# Altium PCB Line_follower1_PCB.PcbDoc (part 1 of 2)
Units mil, origin at the board's own origin, x right, y up, seen from the top; angles counter-clockwise.
Board outline 3907.67 x 2313.18 mil, 2 copper layers (Top Layer, Bottom Layer); 67 components, 62 nets, 270 pads, 120 vias.
Unrouted connection lines stored in the file: 2.
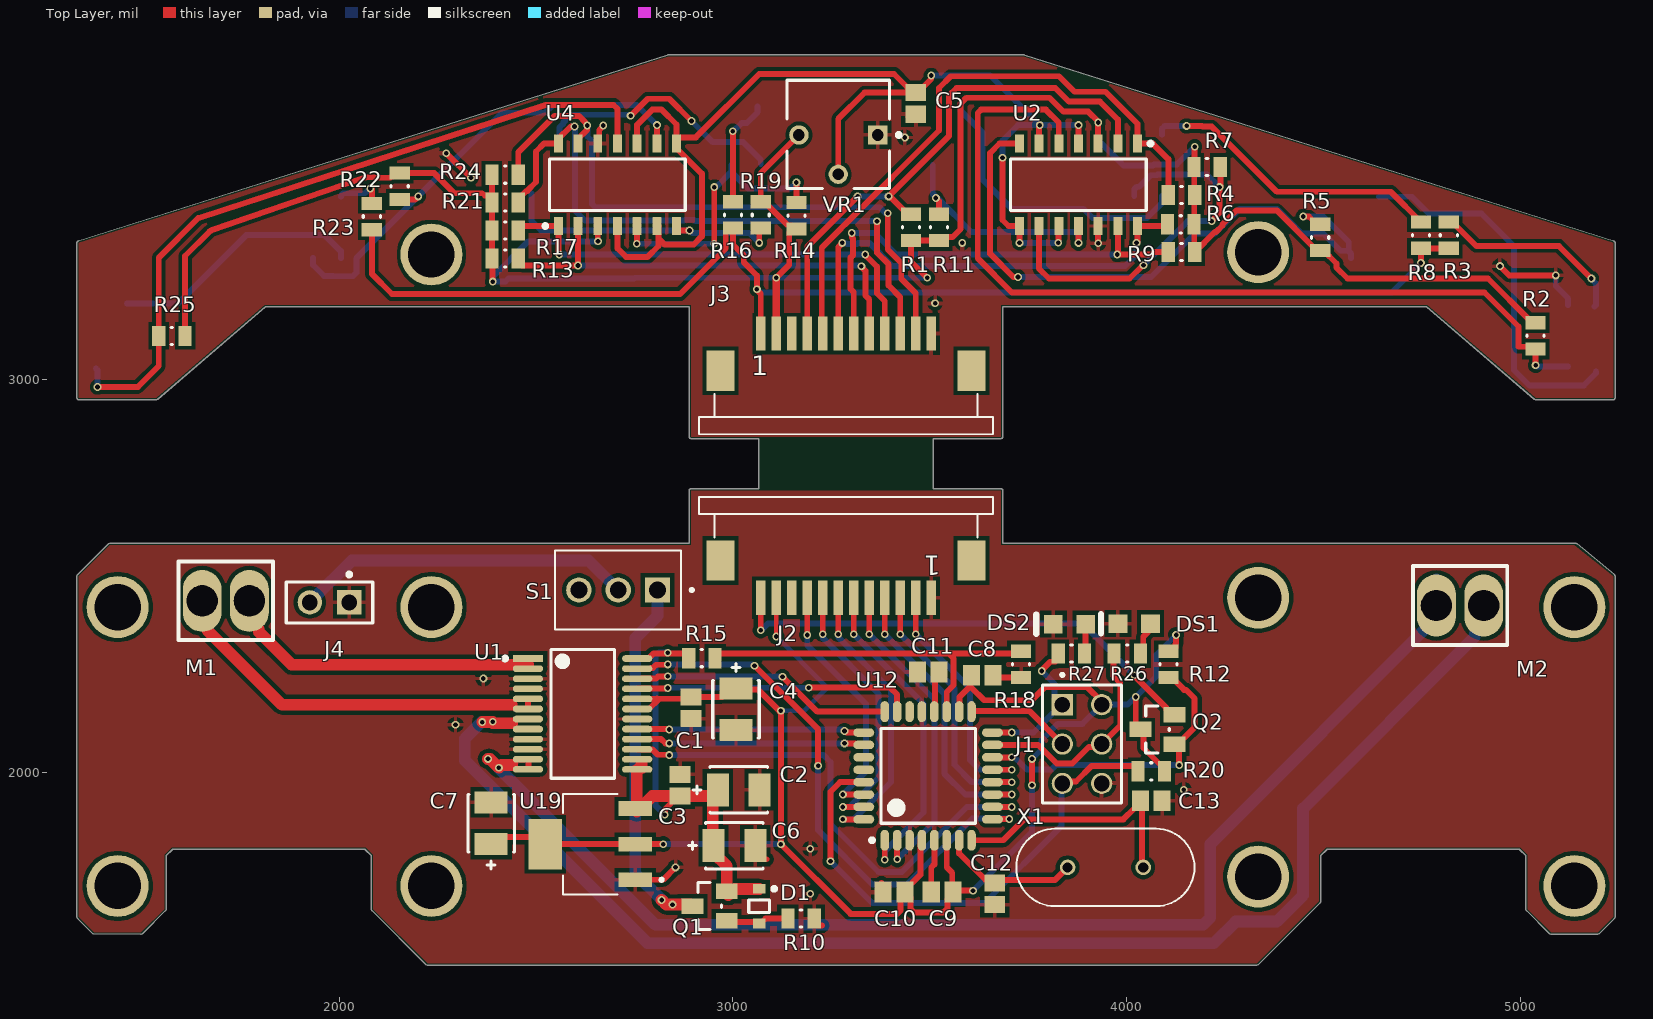
[diagram p0: Top Layer view]
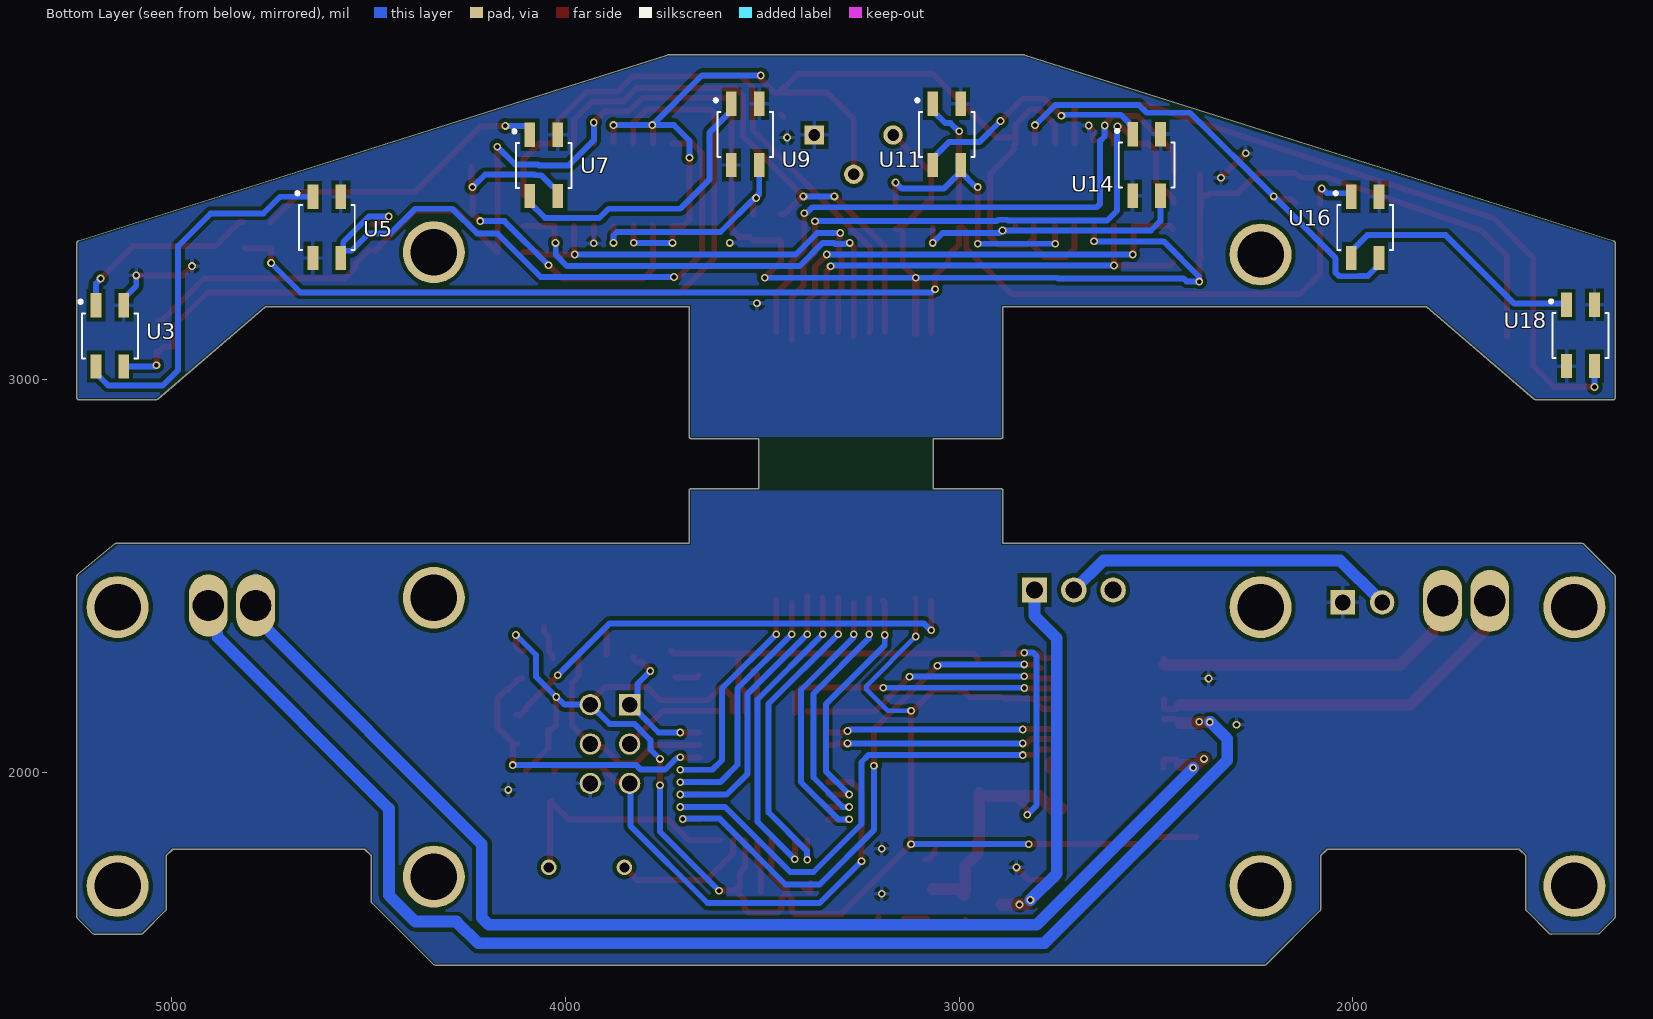
[diagram p1: Bottom Layer view, seen from below]
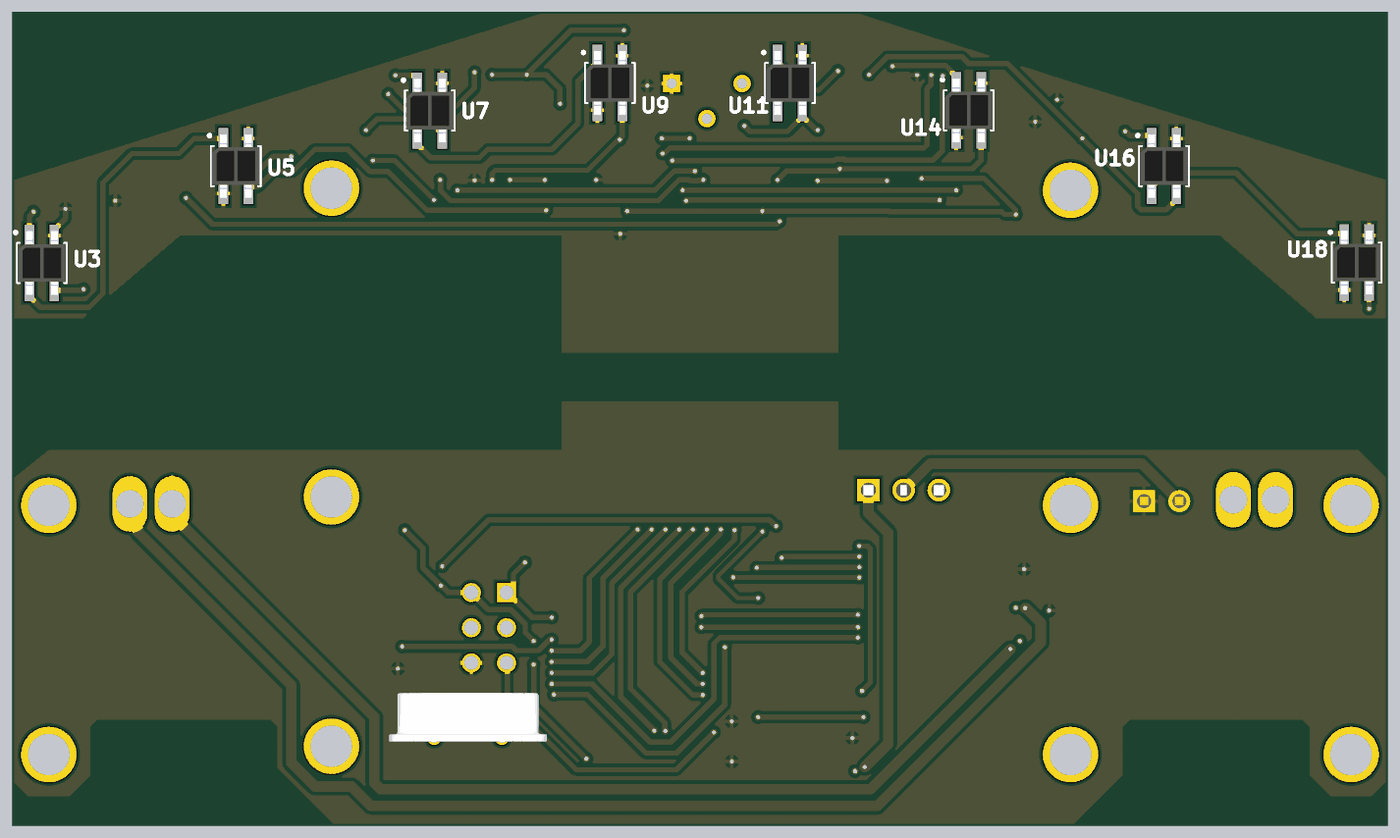
[diagram p2: 3D render of the assembled board from below, using the file's embedded part models]

## Layer stack, top to bottom
Top Solder: solder mask 0.4, Solder Resist, Dk 3.5
Top Layer: signal copper 1.4
Dielectric 1: dielectric 12.6, FR-4, Dk 4.8
Bottom Layer: signal copper 1.4
Bottom Solder: solder mask 0.4, Solder Resist, Dk 3.5

## Board outline
1374.41,1590.94 1335.04,1630.31 1333.57,1633.86 1333.57,2500 1335.04,2503.55 1413.78,2582.29 1417.32,2583.76 2888.69,2583.76 2888.69,2716.54 cw(c2893.7,2716.54) 2893.7,2721.55 3065.85,2721.55 3065.85,2849.32 2893.7,2849.32 cw(c2893.7,2854.33) 2888.69,2854.33 2888.69,3183.96 1812.88,3183.96 1538.7,2948.95 1535.43,2947.74 1338.58,2947.74 cw(c1338.58,2952.76) 1333.57,2952.76 1333.57,3346.46 cw(c1338.58,3346.46) 1337.07,3351.24 2833.13,3823.68 2834.65,3823.91 3740.16,3823.91 3741.68,3823.68 5237.72,3351.24 cw(c5236.21,3346.45) 5241.24,3346.46 5241.24,2952.76 cw(c5236.22,2952.76) 5236.22,2947.74 5039.37,2947.74 5036.11,2948.95 4761.92,3183.96 3686.12,3183.96 3686.12,2854.33 cw(c3681.1,2854.33) 3681.1,2849.32 3508.95,2849.32 3508.95,2721.55 3681.1,2721.55 cw(c3681.1,2716.54) 3686.12,2716.54 3686.12,2583.76 5141.73,2583.76 5144.96,2582.58 5239.42,2503.87 5241.24,2500 5241.24,1633.86 5239.77,1630.31 5200.4,1590.94 5196.85,1589.47 5078.74,1589.47 5075.19,1590.94 5016.14,1650 5014.67,1653.54 5014.67,1789.26 4997.92,1806.01 4509.95,1806.01 4493.2,1789.26 4493.2,1673.23 4491.74,1669.68 4334.25,1512.2 4330.71,1510.73 2224.41,1510.73 2220.86,1512.2 2083.07,1650 2081.6,1653.54 2081.6,1789.26 2064.85,1806.01 1576.88,1806.01 1560.13,1789.26 1560.13,1653.54 1558.66,1650 1499.61,1590.94 1496.06,1589.47

## Design rules (kind name [scope] priority, off if disabled: settings)
Clearance [All] p1: gap=10 ignorepadtopadclearanceinfootprint=FALSE except(0: Arc-Hole Track-Hole SMDPad-Hole THPad-Hole Via-Hole Fill-Hole Poly-Hole Region-Hole Text-Hole; 5: SMDPad-SMDPad; 7.87: Arc-SMDPad Track-SMDPad; 19.68: THPad-THPad)
HoleSize [All] p1: absolutevalues=TRUE maxlimit=248.03 minlimit=11.81 maxpercent=80.000 minpercent=20.000
PolygonConnect [All] p1: connectstyle=Relief reliefconductorwidth=10 reliefentries=4 polygonreliefangle="90 Angle" airgapwidth=10
RoutingVias [All] p1: holewidth=11.81 width=19.68 viastyle="Through Hole" minholewidth=11.81 minwidth=19.68 maxholewidth=19.68 maxwidth=27.56
SilkToSolderMaskClearance [IsPad] p1: minsilkscreentomaskgap=3.94 clearancetoexposedcopper=TRUE
SolderMaskExpansion SolderMaskExpansion_Vias [IsVia] p1: expansion=4 istentingtop=TRUE
SolderMaskExpansion [All] p2: expansion=4 istentingtop=FALSE
Width [All] p1: maxlimit=100 minlimit=10 preferedwidth=19.68 minimp=50.000000 maximp=50.000000 favimp=50.000000
28 further rules are at their usual default settings.

## Components (designator, comment, footprint, x,y, rotation, side; value= is the part's Value field where it differs from the comment)
C1 "100n" CAPC2013X88X50LL20T25 2893.7,2165.35 r90 top
C2 "10u" FP-T491B106K020AT-MFG 3014.76,1956.69 r180 top
C3 "100n" CAPC2013X88X50LL20T25 2866.14,1968.5 r270 top
C4 "10u" FP-T491B106K020AT-MFG 3007.87,2161.42 r90 top
C5 "100n" CAPC2013X88X50LL20T25 3464.57,3700.79 r90 top
C6 "10u" FP-T491B106K020AT-MFG 3003.94,1814.96 r180 top
C7 "10u" FP-T491B106K020AT-MFG 2385.83,1872.05 r270 top
C8 "100n" CAPC2013X88X50LL20T25 3633.86,2248.03 r180 top
C9 "100n" CAPC2013X88X50LL20T25 3531.5,1696.85 r0 top
C10 "100n" CAPC2013X88X50LL20T25 3409.45,1696.85 r0 top
C11 "100n" CAPC2013X88X50LL20T25 3496.06,2255.91 r0 top
C12 "22p" CAPC2013X88X50LL20T25 3665.35,1692.91 r270 top
C13 "22p" CAPC2013X88X50LL20T25 4062.99,1929.13 r0 top
D1 "MM3Z10VT1G" ONSC-SOD-323-2-477-02_V 3066.93,1661.42 r270 top
DS1 "HSMG-C170" AVAG-HSMX-C170_V 4019.69,2378.94 r180 top
DS2 "HSMG-C170" AVAG-HSMX-C170_V 3855.31,2377.95 r180 top
J1 "TSW-103-15-F-D" SAMTEC_TSW-103-15-F-D 3837.01,2173.23 r270 top
J2 "68611214422" 68611214422 3287.4,2539.37 r180 top
J3 "68611214422" 68611214422 3287.4,3021.65 r0 top
J4 "M20-9990245" FP-M20-9990245-MFG 1975.2,2433.07 r180 top
M1 "Component_1" PCBComponent_1 1771.65,2437.01 r180 top
M2 "Component_1" PCBComponent_1 4787.4,2425.2 r0 top
Q1 "FDN340P" FP-527AG-MFG 2940.95,1661.42 r180 top
Q2 "FDN340P" FP-527AG-MFG 4078.74,2110.24 r180 top
R1 "10k" RESC0805(2012)_L 3452.76,3385.83 r270 top value="12000.00 Ohm"
R2 "10k" RESC0805(2012)_L 5039.37,3110.24 r90 top value="12000.00 Ohm"
R3 "220R" RESC0805(2012)_L 4818.9,3366.14 r90 top value="12000.00 Ohm"
R4 "10k" RESC0805(2012)_L 4139.76,3468.5 r0 top value="12000.00 Ohm"
R5 "10k" RESC0805(2012)_L 4492.13,3360.24 r270 top value="12000.00 Ohm"
R6 "10k" RESC0805(2012)_L 4137.8,3393.7 r0 top value="12000.00 Ohm"
R7 "10k" RESC0805(2012)_L 4204.72,3539.37 r180 top value="12000.00 Ohm"
R8 "220R" RESC0805(2012)_L 4748.03,3366.14 r90 top value="12000.00 Ohm"
R9 "10k" RESC0805(2012)_L 4139.76,3322.83 r0 top value="12000.00 Ohm"
R10 "10k" RESC0805(2012)_L 3173.23,1629.92 r180 top value="12000.00 Ohm"
R11 "10k" RESC0805(2012)_L 3523.62,3385.83 r270 top value="12000.00 Ohm"
R12 "10k" RESC0805(2012)_L 4106.3,2275.59 r90 top value="12000.00 Ohm"
R13 "10k" RESC0805(2012)_L 2421.26,3307.09 r180 top value="12000.00 Ohm"
R14 "10k" RESC0805(2012)_L 3161.42,3415.35 r270 top value="12000.00 Ohm"
R15 "10k" RESC0805(2012)_L 2921.26,2291.34 r180 top value="12000.00 Ohm"
R16 "220R" RESC0805(2012)_L 3000,3417.32 r90 top value="12000.00 Ohm"
R17 "10k" RESC0805(2012)_L 2421.26,3377.95 r180 top value="12000.00 Ohm"
R18 "10k" RESC0805(2012)_L 3732.28,2275.59 r90 top value="12000.00 Ohm"
R19 "10k" RESC0805(2012)_L 3070.87,3417.32 r90 top value="12000.00 Ohm"
R20 "10k" RESC0805(2012)_L 4062.99,2003.94 r180 top value="12000.00 Ohm"
R21 "10k" RESC0805(2012)_L 2421.26,3448.82 r180 top value="12000.00 Ohm"
R22 "10k" RESC0805(2012)_L 2153.54,3490.16 r90 top value="12000.00 Ohm"
R23 "220R" RESC0805(2012)_L 2082.68,3413.39 r90 top value="12000.00 Ohm"
R24 "10k" RESC0805(2012)_L 2421.26,3519.68 r180 top value="12000.00 Ohm"
R25 "10k" RESC0805(2012)_L 1574.8,3110.24 r0 top value="12000.00 Ohm"
R26 "470R" RESC0805(2012)_L 4001.97,2303.15 r180 top value="12000.00 Ohm"
R27 "470R" RESC0805(2012)_L 3860.24,2303.15 r180 top value="12000.00 Ohm"
S1 "2MS1T1B1M2QES" SW_2MS1T1B1M2QES 2708.66,2464.57 r180 top
U1 "TB6612FNG,C,8,EL" FP-SSOP24-P-300-0_65A-IPC_A 2618.11,2149.61 r0 top
U2 "LM339DR2G" ONSC-SOIC-14-751A-03_V 3877.95,3494.09 r270 top
U3 "QRE1113GR" SOIC180P460X187-4N 5157.48,3110.24 r180 bottom
U4 "LM339DR2G" ONSC-SOIC-14-751A-03_V 2706.69,3494.09 r90 top
U5 "QRE1113GR" SOIC180P460X187-4N 4606.3,3385.83 r180 bottom
U7 "QRE1113GR" SOIC180P460X187-4N 4055.12,3543.31 r180 bottom
U9 "QRE1113GR" SOIC180P460X187-4N 3543.31,3622.05 r180 bottom
U11 "QRE1113GR" SOIC180P460X187-4N 3031.5,3622.05 r180 bottom
U12 "ATmega328-AUR" 32A_L 3496.06,1992.13 r90 top
U14 "QRE1113GR" SOIC180P460X187-4N 2523.62,3544.29 r180 bottom
U16 "QRE1113GR" SOIC180P460X187-4N 1968.5,3385.83 r180 bottom
U18 "QRE1113GR" SOIC180P460X187-4N 1421.26,3111.22 r180 bottom
U19 "LM1117MP-5.0" SOT230P700X180-4N 2637.8,1818.9 r180 top
VR1 "3362P-1-103LF" BOUR-3362P 3267.72,3622.05 r180 top
X1 "ABL-16.000MHZ-T" XTAL_HC49P488W46L1150T500H350 3946.46,1759.84 r180 top

## Footprints (in the part's own frame and the unit in brackets; to place one, negate y for a bottom-side part, rotate by r counter-clockwise, add the part's x,y. Pads: shape width x height; smd on the part's side, far side on the other; paste and mask are expansions set on the pad)
32A_L [mm] "Thin QFP, 32-Leads, Body 7x7mm, Pitch 0.8mm, IPC High Density"
  oval 1.35x0.55 smd: 1(-4.15,2.8) 2(-4.15,2) 3(-4.15,1.2) 4(-4.15,0.4) 5(-4.15,-0.4) 6(-4.15,-1.2) 7(-4.15,-2) 8(-4.15,-2.8) 17(4.15,-2.8) 18(4.15,-2) 19(4.15,-1.2) 20(4.15,-0.4) 21(4.15,0.4) 22(4.15,1.2) 23(4.15,2) 24(4.15,2.8)
  oval 0.55x1.35 smd: 9(-2.8,-4.15) 10(-2,-4.15) 11(-1.2,-4.15) 12(-0.4,-4.15) 13(0.4,-4.15) 14(1.2,-4.15) 15(2,-4.15) 16(2.8,-4.15) 25(2.8,4.15) 26(2,4.15) 27(1.2,4.15) 28(0.4,4.15) 29(-0.4,4.15) 30(-1.2,4.15) 31(-2,4.15) 32(-2.8,4.15)
  silkscreen extent -4.27,-3.05 3.05,3.75, body extent -3.5,-3.5 3.5,3.5, height 1.2
68611214422 [mm]
  rect 0.6x2.2 smd: 1(-5.5,2.4) 2(-4.5,2.4) 3(-3.5,2.4) 4(-2.5,2.4) 5(-1.5,2.4) 6(-0.5,2.4) 7(0.5,2.4) 8(1.5,2.4) 9(2.5,2.4) 10(3.5,2.4) 11(4.5,2.4) 12(5.5,2.4)
  rect 1.8x2.6 smd: Z1(-8.1,0) Z2(8.1,0)
  silkscreen extent -9.5,-4.1 9.5,-1.5
AVAG-HSMX-C170_V [mm] "SMD, 2-Leads, Body 2x1.25mm, Height 0.8mm"
  rect 1.2x1.2 smd: 1(-1.05,0) 2(1.05,0)
  silkscreen extent 2.15,-0.63 2.15,0.63, body extent -1,-0.63 1,0.63, height 0.8
BOUR-3362P [mm] "THD, 3-Leads, Body 6.6x6.99mm, Pitch 2.54mm"
  rect 1.25x1.25 hole 0.75: 1(-2.54,0.035)
  round 1.25 hole 0.75: 2(0,2.575) 3(2.54,0.035)
  silkscreen extent -4.03,-3.49 3.3,3.5, body extent -3.3,-3.49 3.3,3.49, height 4.95
CAPC2013X88X50LL20T25 [mm] "Chip Capacitor, 2-Leads, Body 2.00x1.25mm, IPC High Density"
  rect 1.1x1.35 smd: 1(-0.7,0) 2(0.7,0)
  body extent -1.1,-0.72 1.1,0.72, height 0.88
FP-527AG-MFG [mm]
  rect 1.4x1 smd paste+0 mask+0: 1(-1.1,0.95) 2(-1.1,-0.95) 3(1.1,0)
  silkscreen extent -0.76,-1.52 0.76,1.52, body extent -1.9,-1.62 1.9,1.62, height 0.25
FP-M20-9990245-MFG [mm]
  rect 1.57x1.57 hole 1.02 paste-2539.97 mask+0: 1(-1.27,0)
  round 1.57 hole 1.02 paste-2539.97 mask+0: 2(1.27,0)
  silkscreen extent -2.79,-1.92 2.79,1.32, body extent -2.89,-1.42 2.89,1.42, height 0.25
FP-SSOP24-P-300-0_65A-IPC_A [mm]
  rect 1.954x0.432 smd paste+0 mask+0: 1(-3.525,3.575)
  rrect100% 1.954x0.432 smd paste+0 mask+0: 2(-3.525,2.925) 3(-3.525,2.275) 4(-3.525,1.625) 5(-3.525,0.975) 6(-3.525,0.325) 7(-3.525,-0.325) 8(-3.525,-0.975) 9(-3.525,-1.625) 10(-3.525,-2.275) 11(-3.525,-2.925) 12(-3.525,-3.575) 13(3.525,-3.575) 14(3.525,-2.925) 15(3.525,-2.275) 16(3.525,-1.625) 17(3.525,-0.975) 18(3.525,-0.325) 19(3.525,0.325) 20(3.525,0.975) 21(3.525,1.625) 22(3.525,2.275) 23(3.525,2.925) 24(3.525,3.575)
  silkscreen extent -5.13,-4.15 2.05,4.15, body extent -5,-4.65 5,4.65, height 0.25
FP-T491B106K020AT-MFG [mm]
  rect 1.42x2.13 smd paste+0 mask+0: 1(-1.35,0) 2(1.35,0)
  silkscreen extent -1.85,-1.5 2.95,1.5, body extent -2.18,-1.62 2.18,1.62, height 0.25
ONSC-SOD-323-2-477-02_V [mm] "SOD, 2-Leads, Body 1.7x1.25mm"
  rect 0.63x0.83 smd: 1(-1.115,0) 2(1.115,0)
  silkscreen extent -1.24,-0.67 0.4,1.09, body extent -0.85,-0.63 0.85,0.63, height 1.06
ONSC-SOIC-14-751A-03_V [mm] "SOIC, 14-Leads, Body 8.75x4mm, Pitch 1.27mm"
  rect 1.18x0.58 smd: 1(-2.66,3.81) 2(-2.66,2.54) 3(-2.66,1.27) 4(-2.66,0) 5(-2.66,-1.27) 6(-2.66,-2.54) 7(-2.66,-3.81) 8(2.66,-3.81) 9(2.66,-2.54) 10(2.66,-1.27) 11(2.66,0) 12(2.66,1.27) 13(2.66,2.54) 14(2.66,3.81)
  silkscreen extent -2.78,-4.38 1.67,4.78, body extent -2,-4.38 2,4.38, height 1.75
PCBComponent_1 [mm]
  oval 2.5x4 hole 2: 1(0,0) 2(3.048,0)
  silkscreen extent -1.52,-2.54 4.57,2.54
RESC0805(2012)_L [mm] "Chip Resistor, Body 2.0x1.3mm, IPC High Density"
  rect 0.85x1.3 smd: 1(-0.85,0) 2(0.85,0)
  silkscreen extent -0.05,-0.55 0.05,0.55, body extent -1.1,-0.67 1.1,0.68, height 0.7
SAMTEC_TSW-103-15-F-D [mm]
  rect 1.37x1.37 hole 1.02: 01(0,0)
  round 1.37 hole 1.02: 02(0,2.54) 03(2.54,0) 04(2.54,2.54) 05(5.08,0) 06(5.08,2.54)
  silkscreen extent -2.02,-1.27 6.35,3.81
SOIC180P460X187-4N [mm]
  rect 0.69x1.57 smd: 1(-0.9,1.975) 2(-0.9,-1.975) 3(0.9,-1.975) 4(0.9,1.975)
  silkscreen extent -2,-1.45 1.8,2.3, body extent -1.7,-2.3 1.7,2.3, height 1.87
SOT230P700X180-4N [mm]
  rect 2.15x0.95 smd: 1(-2.9,2.3) 2(-2.9,0) 3(-2.9,-2.3)
  rect 2.15x3.25 smd: 4(2.9,0)
  silkscreen extent -4.7,-3.25 1.75,3.25
SW_2MS1T1B1M2QES [mm]
  rect 1.635x1.635 / inner round 1.635 / far side rect 1.635x1.635 hole 1.09: 1(-2.54,0)
  round 1.635 hole 1.09: 2(0,0) 3(2.54,0)
  silkscreen extent -4.85,-2.54 4.07,2.54, body extent -4.07,-3 4.07,3, height 23.63
XTAL_HC49P488W46L1150T500H350 [mm]
  round 1.007 hole 0.657: 1(-2.44,0) 2(2.44,0)
  silkscreen extent -5.75,-2.5 5.75,2.5, body extent -5.75,-3.25 5.75,5.75, height 2.5

## Part data
C1 C3 C5 C8 C9 C10 C11 C12 C13: library part CMP-2007-00266-1, "0805", Manufacturer=Kemet, Part Number=C0805C103K5RACTU
C2 C4 C6 C7: library part CMP-2000-07191-2, "CAP TANT 10UF 10% 20V 1411", Capacitance=10uF, Case Code (Imperial)=1411, Case Code (Metric)=3528, Dielectric Material=Tantalum, ESR (Equivalent Series Resistance)=2.1R, Leakage Current=2uA, Max Operating Temperature=125°C, Min Operating Temperature=-55°C, Package Quantity=1, Ripple Current=201mA, Tolerance=10%, Voltage=20V, Case/Package=1411, Depth=2.8mm, Dissipation Factor=6%, Failure Rate=0.001%, Features="General Purpose", Height=1.9mm, Height - Seated (Max)=0.083inch, Lead Free="Lead Free", Length=3.5mm, Life (Hours)=2000Hour, Mount="Surface Mount", Number of Pins=2, Packaging="Tape and Reel", Polarity=Polar, Radiation Hardening=No, REACH SVHC="No SVHC", RoHS Compliant=Yes, Termination=SMD/SMT, Voltage Rating=20V, Voltage Rating (DC)=20V, Weight=0.002293oz, Width=2.8mm
D1: library part CMP-1060-00715-1, "Zener Voltage Regulator, 300 mW, 2-Pin SOD-323, Pb-Free, Tape and Reel", Manufacturer="On Semiconductor", ComponentLink1Description="Manufacturer URL", ComponentLink1URL=http://www.onsemi.com/, ComponentLink2Description=Datasheet, ComponentLink2URL=http://www.onsemi.cn/pub_link/Collateral/MM3Z2V4T1-D.PDF, ComponentLink3Description="Package Specification", ComponentLink3URL=http://www.onsemi.com/pub_link/Collateral/477-02.PDF.1, DatasheetVersion="Rev. 9", Mounting Technology="Surface Mount", P Max (W)=0.3, PackageDescription="2-Pin SOD, Body 1.7 x 1.25 mm", PackageReference=SOD-323-2-477-02, PackageVersion="Rev. H, 03/2007", Packing="Tape and Reel", PartNumber=MM3Z10VT1G, RoHS=Pb-Free, VZ Typ (V)=10
DS1 DS2: library part CMP-2000-05062-1, "Chip LED, Green, 2.2 V, -40 to 85 degC, 2-Pin SMD, Pb-Free, Tape and Reel", Forward Current If=20mA, Forward Voltage=2.2V, Forward Voltage VF Max=2.6V, LED Colour=Green, Manufacturer=Avago, Operating Temperature Max=85degC, Operating Temperature Min=-30degC, Operating Temperature Range=-30degCto+85degC, Opto Case Style=SMD, Package Description="2-Pin Surface Mount Device, Body 2 x 1.25 mm, Height 0.8 mm", Package Reference=HSMX-C170, Storage Temperature Min=-40degC, Bulb Size=1.25mmx1.4mm, Datasheet URL=https://datasheet.ciiva.com/29280/180495-da-01-en-chip-led-hsmg-c170-gelb-gruen-29280971.pdf, Datasheet Version=Oct-08, Dominant Wavelength=572nm, Dominant Wavelength Typ=572nm, External Depth=0.8mm, External Length / Height=2mm, External Width=1.25mm, Forward Current If Max=20mA, LED Mounting=SMD, LED Type=Standard, Lens Shape=Rectangular, Light Area Height=1mm, Luminous Intensity=15mcd, Luminous Intensity Min=4mcd, Luminous Intensity Typ=15mcd, Manufacturer URL=http://www.avagotech.com/, Mounting Type=SMD, MSL=MSL2A-4weeks, No. of Pins=2, Opto Mounting Orientation=Top, Packaging=CutTape, Peak Forward Current=20mA, Peak Wavelength=570nm, PIV Max=5V, Storage Temperature Max=85degC, SVHC=NoSVHC(16-Jun-2014), Viewing Angle=170deg, Voltage Vf Typ=2.2V, Wavelength Typ=570nm
J1: Package=None, Availability=Unavailable, MP=TSW-103-15-F-D, Price=None
J2 J3: "12 Position FPC Connector Contacts, Bottom 0.039 (1.00mm) Surface Mount, Right Angle", Package=None, Availability="In Stock", Check_prices=https://www.snapeda.com/parts/68611214422/Wurth+Elektronik/view-part/?ref=eda, MF="Wurth Elektronik", MP=68611214422, Price=None, Purchase-URL=https://pricing.snapeda.com/search/part/68611214422/?ref=eda, SnapEDA_Link=https://www.snapeda.com/parts/68611214422/Wurth+Elektronik/view-part/?ref=snap
J4: library part CMP-15831-000105-1, "CONN HEADER VERT 2POS 2.54MM", Case/Package=SIL, Color=Black, Contact Resistance=25mR, Current=3A, Flammability Rating="UL94 V-0", Insulation Resistance=10GR, Max Operating Temperature=105°C, Min Operating Temperature=-40°C, Package Quantity=1000, Voltage=50V, Voltage Rating (AC)=750V, Connector Type="Male Pin", Contact Finish - Mating=GOLD, Contact material=Brass, Contact Mating Length=0.24inch, Contact Plating=Gold, Contact Shape=Square, Contact Type="Male Pin", Current Rating=3A, Depth=2.54mm, Fastening Type=Pull, Gender=Male, Height=0.12inch, Housing Color=Black, Housing material=Nylon, Insulation Color=Black, Insulation Material=Nylon, Lead Pitch=2.54mm, Length=5.08mm, Mated Stacking Heights=16.54mm, Mating Cycles=300, Max Current Rating=3A, Mount="Through Hole", Number of Contacts=2, Number of Poles=2, Number of Positions=2, Number of Rows=1, Orientation=Straight, Packaging=Bulk, Pitch=2.54mm, Radiation Hardening=No, Reach SVHC Compliant=Yes, Series=M20, Termination=Solder, Weight=0.25lb, Width=0.25inch, Working Voltage=750V
M1 M2: "Pady do silnika"
Q1 Q2: library part CMP-2100-03638-2, "MOSFET P-CH 20V 2A SSOT3", Case/Package=SOT-23, Continuous Drain Current (ID)=2A, Current Rating=-2A, Drain to Source Breakdown Voltage=-20V, Drain to Source Resistance=60mR, Drain to Source Voltage (Vdss)=20V, Gate to Source Voltage (Vgs)=8V, Input Capacitance=779pF, Max Operating Temperature=150°C, Max Power Dissipation=500mW, Min Operating Temperature=-55°C, On-State Resistance=70MR, Package Quantity=1, Threshold Voltage=-800mV, Contact Plating=Tin, Dual Supply Voltage=-20V, Element Configuration=Single, Fall Time=11ns, Height=0.94mm, Lead Free="Lead Free", Length=2.92mm, Mount="Surface Mount", Nominal Vgs=-800mV, Number of Elements=1, Number of Pins=3, Packaging="Tape and Reel", Power Dissipation=500mW, Radiation Hardening=No, Rds On Max=70mR, REACH SVHC="No SVHC", Rise Time=9ns, Termination=SMD/SMT, Turn-Off Delay Time=27ns, Turn-On Delay Time=10ns, Voltage Rating (DC)=-20V, Weight=0.03g, Width=3.05mm
R1 R2 R4 R5 R6 R7 R9 R10 R11 R12 R13 R14 R15 R17 R18 R19 R20 R21 R22 R24 R25: library part CMP-1013-00631-1, "10K 0.125W 1% 0805 (2012 Metric)  SMD", Case-EIA=0805, Case-Metric=2012, Power="0.125 W", Tolerance="1 %", Technology=SMT
R3 R8 R16 R23 R26 R27: library part CMP-1013-00631-1, "220 0.125W 1% 0805 (2012 Metric)  SMD", Case-EIA=0805, Case-Metric=2012, Power="0.125 W", Tolerance="1 %", Technology=SMT
S1: "Toggle Switches Sub-Miniature SPDT switch on-on pc thru-hole", Package=None, Check_prices=https://www.snapeda.com/parts/2MS1T1B1M2QES/E%2526E/view-part/?ref=eda, MF=Dailywell, MP=2MS1T1B1M2QES, SnapEDA_Link=https://www.snapeda.com/parts/2MS1T1B1M2QES/E%2526E/view-part/?ref=snap
U1: library part CMP-2100-03693-4, "IC MOTOR DRIVER 2.7V-5.5V 24SSOP", Case/Package=SSOP, Max Operating Temperature=85°C, Max Supply Voltage=5.5V, Min Operating Temperature=-20°C, Min Supply Voltage=2.7V, Operating Supply Voltage=3V, Output Current=1A, Package Quantity=1, Interface=Parallel, Logic Function="AND GATE", Mount="Surface Mount", Number of Outputs=2, Number of Pins=24, Packaging="Tape and Reel", Series=-
U2 U4: library part CMP-1305-00036-1, "Single Supply Quad Comparators, 0 to 70 degC, 14-Pin SOIC, Pb-Free, Tape and Reel", Manufacturer="On Semiconductor", ComponentLink1Description="Manufacturer URL", ComponentLink1URL=http://www.onsemi.com/, ComponentLink2Description=Datasheet, ComponentLink2URL=http://www.onsemi.com/pub_link/Collateral/LM339-D.PDF, ComponentLink3Description="Package Specification", ComponentLink3URL=http://www.onsemi.com/pub_link/Collateral/751A-03.PDF, DatasheetVersion="Rev. 20", IO Typ (mA)=16, Mounting Technology="Surface Mount", PackageDescription="14-Pin Small Outline Integrated Circuit, Body 8.65 x 3.9 mm, Pitch 1.27 mm", PackageReference=SOIC-14-751A-03, PackageVersion="Rev. K, 05/2011", Packing="Tape and Reel", PartNumber=LM339DR2G, RoHS=TRUE
U3 U5 U7 U9 U11 U14 U16 U18: "Reflective Optical Sensor 0.039 (1mm) 4-SMD, Gull Wing", Package="ARUSM-313-4 ON Semiconductor", Availability="In Stock", Check_prices=https://www.snapeda.com/parts/QRE1113GR/Onsemi/view-part/?ref=eda, MF="ON Semiconductor", MP=QRE1113GR, Price=None, Purchase-URL=https://pricing.snapeda.com/search/part/QRE1113GR/?ref=eda, SnapEDA_Link=https://www.snapeda.com/parts/QRE1113GR/Onsemi/view-part/?ref=snap
U12: library part CMP-0095-00268-2, "8-bit AVR Microcontroller, 32KB Flash, 1KB EEPROM, 2KB SRAM, 32-pin TQFP, Industrial Grade (-40°C to 85°C), Reel", Code_JEDEC=MS-026-ABA, ComponentLink1Description="Manufacturer URL", ComponentLink1URL=http://www.atmel.com/, ComponentLink2Description="ATmega48A/48PA/88A/88PA/168A/168PA/328/328P Datasheet", ComponentLink2URL=http://www.atmel.com/dyn/resources/prod_documents/doc8271.pdf, ComponentLink3Description="ATmega48A/48PA/88A/88PA/168A/168PA/328/328P Summary", ComponentLink3URL=http://www.atmel.com/dyn/resources/prod_documents/8271S.pdf, DatasheetVersion="revD, May-2011", PackageDescription="32-Lead, 7x7x1.0 mm Body, 0.8mm Lead Pitch, Thin Profile Plastic Quad Flat Package (TQFP)", PackageReference=32A, PackageVersion="revC, Oct-2010", RevisionNote="DatasheetVersion & PackageVersion updated. URLs added."
U19: "Space Saving 800mA Low-Dropout Linear Regulator with Internal Current Limit", Package="SOT-223-4 Texas Instruments", Availability=Unavailable, DigiKey-Purchase-URL=https://snapeda.com/shop?store=DigiKey&id=22380, MF="Texas Instruments", Mouser-Purchase-URL=https://snapeda.com/shop?store=Mouser&id=22380, MP=LM1117MP-5.0/NOPB, Price=None, SnapEDA_Link=https://www.snapeda.com/parts/LM1117MP-5.0/NOPB/Texas%20Instruments/view-part/22380/?ref=snap, Texas_Instruments-Purchase-URL=https://snapeda.com/shop?store=Texas+Instruments&id=22380
VR1: library part CMP-1747-00004-1, "Square Trimpot(R) Trimming Potentiometer, 10 KOhm, 300 V, -55 to 125 degC, 3-Pin THD, RoHS, Tube", Case Code (Imperial)=0612, Case Code (Metric)=1632, Case/Package=1206, Max Operating Temperature=125degC, Min Operating Temperature=-25degC, Package Quantity=5000, Power Rating="1 W", Resistance="50 mohm", Tolerance=1%, Voltage Rating="220 mV", ComponentLink1Description="Manufacturer URL", ComponentLink1URL=http://www.bourns.com/, ComponentLink2Description=Datasheet, ComponentLink2URL=http://www.bourns.com/docs/Product-Datasheets/3362.pdf, DatasheetVersion=May-16, Height="0.6 mm", Length="3.2 mm", Mount="Surface Mount", PackageDescription="3-Pin Through Hole Device, Body 6.6 x 6.99 mm, Pitch 2.54 mm", PackageReference=3326P, Packaging="Tape and Reel", Pins=2, REACH SVHC="No SVHC", RoHSCompliant=True, Width="1.6 mm"
X1: "16 MHz Â±10ppm Crystal 18pF 40 Ohms HC-49/US", Package=None, Availability="In Stock", Check_prices=https://www.snapeda.com/parts/ABL-16.000MHZ/Abracon/view-part/?ref=eda, MF="Abracon Corporation", MP=ABL-16.000MHZ, Price=None, Purchase-URL=https://pricing.snapeda.com/search/part/ABL-16.000MHZ/?ref=eda, SnapEDA_Link=https://www.snapeda.com/parts/ABL-16.000MHZ/Abracon/view-part/?ref=snap

## Free pads (board coordinates)
  round 157.48 hole 118.11: 0(1437.01,1712.6) 0(1437.01,2421.26) 0(2234.25,1712.6) 0(2234.25,2421.26) 0(2234.25,3316.93) 0(4334.65,1736.22) 0(4334.65,2444.88) 0(4334.65,3322.83) 0(5137.8,1712.6) 0(5137.8,2421.26)

## Via types
v1: diameter 19.68, hole 11.81, Top Layer to Bottom Layer, tented both sides, 120 vias

## Nets (pads, with @x,y where several pads share a name; then routed paths per layer and width w, separated by ;. In a path a pad name is that pad's centre, name@x,y a point inside that pad or via, vN(x,y) a via of type N, cw(c..) or ccw(c..) an arc to the next point about the centre after c; other vN are vias at no path point)
+5: C1.2 C4.2 C7.2 C8.2 C9.2 C10.2 J1.02 J2.11 J3.2 Q2.3 R1.2 R2.2 R4.2 R5.2 R6.2 R7.2 R9.2 R11.2 R12.2 R13.2 R14.2 R17.2 R19.2 R20.1 R21.2 R22.2 R24.2 R25.2 U1.19 U1.20 U2.3 U4.3 U12.4 U12.6 U12.18 U19.2 U19.4 VR1.3 | length 10600.3
  Top Layer w12: v1(3110.24,2346.46) J2.11 ; v1@3118.11,2153.54 3120.08,2155.51 v1(3122.05,2157.48)
  Top Layer w15: R25.2 1608.27,3312.99 1670.78,3375.5 cw(c1681.38,3364.89) 1676.51,3379.08 2062.99,3511.81 2067.01,3511.81 2068.38,3513.19 2089.1,3513.19 2090.47,3511.81 2129.92,3511.81 2132.5,3514.39 2135.45,3514.39 R22.2@2145.67,3524.61 ; R22.2 2241.33,3523.62 2292.51,3472.44 2362.2,3472.44 ; 2369.7,3466.91 2378.56,3466.91 R21.2@2387.8,3457.68 ; R13.2@2385.83,3311.02 2388.87,3307.98 2388.87,3248.93 v1(2389.76,3248.03) ; R21.2@2385.83,3437.99 R21.2@2385.83,3452.76 ; R13.2@2387.8,3311.02 R17.2 R21.2@2387.8,3444.88 ; R21.2 R24.2 ; C7.2@2397.64,1836.61 2513.78,1836.61 U19.4@2519.68,1830.71 ; U19.4@2515.75,1822.83 U19.4@2515.75,1830.71 ; U19.4@2519.69,1818.9 U19.4 U19.2 v1(2822.83,1818.9) ; U4.3 2656.69,3351.18 v1(2657.48,3350.39) ; U1.19 2786.85,2162.4 2810.26,2185.81 ; U1.20 2757.29,2188.38 2807.09,2188.38 ; 2807.09,2188.98 2807.69,2188.38 C1.2@2886.43,2188.38 ; C1.2 2972.24,2192.91 2987.99,2208.66 C4.2@3000,2208.66 ; C4.2 3010.37,2212.07 3063.52,2212.07 3120.08,2155.51 3122.05,2153.54 v1(3122.05,1818.9) 3299.21,1641.73 3417.32,1641.73 3426.11,1650.52 3426.11,1682.02 C10.2@3440.94,1696.85 ; v1(3110.24,3257.87) 3143.33,3290.96 3143.33,3372.66 3152.56,3381.89 R14.2 ; R14.2@3157.48,3381.89 3148.25,3391.12 3139.39,3391.12 3079.72,3450.79 R19.2 3070.87,3523.82 3165.35,3618.31 VR1.3@3165.35,3622.05 ; C10.2@3437.01,1701.77 3476.38,1741.14 U12.4@3476.38,1830.71 ; C10.2@3438.98,1694.88 3451.16,1682.7 3451.16,1654.46 3459.95,1645.67 3535.43,1645.67 3544.9,1655.14 3544.9,1677.78 C9.2@3560.04,1692.91 ; v1(3494.09,3257.87) 3452.76,3299.21 R1.2 R11.2@3521.65,3352.36 ; R11.2 3532.85,3361.59 3558.44,3361.59 3578.74,3381.89 3578.74,3700.79 3593.11,3715.16 3804.53,3715.16 3839.76,3679.92 3902.76,3679.92 v1@3927.95,3654.72 ; U12.6 3543.31,1759.84 3557.22,1745.93 C9.2@3557.22,1702.62 ; C9.2@3559.06,1701.77 C9.2 3566.93,1704.72 3570.87,1700.79 v1(3610.24,1700.79) ; U12.18 3576.08,2156.78 3576.08,2193.2 3602.85,2219.98 ; 3606.3,2216.54 3638.41,2184.43 3759.23,2184.43 3792.5,2217.7 3900.41,2217.7 J1.02@3937.01,2181.1 ; v1(3759.84,1968.5) v1(3759.84,2035.43) ; U2.3 v1(3927.95,3652.36) ; v1(4023.62,2192.91) 4023.62,2122.05 Q2.3 ; Q2.3@4043.31,2110.24 4043.31,2062.99 R20.1@4100.39,2005.91 ; R12.2 4115.16,2309.06 4124.39,2318.29 4124.39,2327.15 4125.98,2328.74 v1(4125.98,2350.39) ; R6.2 4172.24,3394.68 R4.2@4172.24,3468.5 ; R6.2@4172.24,3390.75 4172.24,3323.82 R9.2 4224.84,3374.45 4227.86,3374.45 4243.88,3390.47 4243.88,3393.48 4279.53,3429.13 4381.89,3429.13 4474.04,3336.99 4474.04,3336 4483.27,3326.77 R5.2@4484.25,3326.77 ; R4.2 4172.24,3469.49 4172.24,3536.42 4169.29,3539.37 4172.33,3542.41 4172.33,3589.65 v1(4173.23,3590.55) ; R5.2@4496.06,3326.77 4500.98,3326.77 4533.77,3293.99 4533.77,3283.46 4561.33,3255.91 4918.31,3255.91 5024.61,3149.61 R2.2@5035.43,3149.61
  Top Layer w20: J3.2 v1(3110.24,3257.87)
  Bottom Layer w12: v1(3110.24,2346.46) 3235.19,2221.51 3235.19,2211.56 3181.1,2157.48 v1(3122.05,2157.48)
  Bottom Layer w15: v1(2657.48,3350.39) 2480.32,3350.39 2390.66,3260.74 2390.66,3248.93 v1(2389.76,3248.03) 2390.14,3248.41 2422.11,3248.41 2429.61,3255.91 2748.57,3255.91 2750.54,3257.87 v1(3110.24,3257.87) v1(3494.09,3257.87) ; v1(2822.83,1818.9) v1(3122.05,1818.9) ; v1(3610.24,1700.79) 3759.84,1850.39 v1(3759.84,1968.5) ; v1(3759.84,2035.43) 3783.91,2059.5 3783.91,2083.13 3825.24,2124.45 3888.23,2124.45 J1.02 4002.67,2173.23 4022.35,2192.91 v1(4023.62,2192.91) 4074.8,2244.09 4074.8,2299.21 v1(4125.98,2350.39) ; v1(3927.95,3652.36) 3927.95,3607.48 3992.13,3543.31 4066.93,3543.31 4069.49,3545.87 4128.54,3545.87 v1(4173.23,3590.55)
+5_LED: J2.12 Q2.2 | length 1236.8
  Top Layer w15: v1(3070.87,2362.2) J2.12@3070.87,2437.01 ; v1(4019.68,2248.03) 4019.68,2246.76 4101.99,2164.46 4101.99,2159.82 4114.17,2147.64 Q2.2@4125.98,2147.64
  Bottom Layer w15: v1(3070.87,2362.2) 3072.13,2362.2 3089.63,2379.7 3888.01,2379.7 v1(4019.68,2248.03)
+BAT: C2.2 C3.2 C6.2 D1.1 Q1.2 R15.2 U1.13 U1.14 U1.24 U19.3 | length 1360.2
  Top Layer w15: U1.13@2755.93,2007.93 U1.13 ; U1.14 2760.33,2034.45 U1.14@2767.72,2027.06 ; U1.24 2758.91,2290.35 2759.84,2291.28 2786.2,2291.28 2797.85,2302.93 v1@2834.65,2302.93 ; v1(2826.77,1893.7) 2827.67,1894.6 2827.67,1907.39 2861.22,1940.94 C3.2@2862.2,1940.94 ; v1(2834.65,2305.28) 2834.65,2303.15 v1@2834.65,2302.93 ; R15.2@2889.76,2303.15 2889.55,2302.93 v1@2834.65,2302.93 ; C2.2@2935.04,1940.94 2950.79,1956.69 C2.2@2946.85,1956.69
  Top Layer w30: U19.3@2740.16,1909.45 2744.73,1909.45 2755.93,1920.65 U1.13@2755.93,2007.93 ; U19.3@2755.91,1901.57 2795.28,1940.94 C3.2@2861.22,1940.94 ; U1.13@2767.72,2011.81 U1.14@2767.72,2027.06 ; C3.2@2862.2,1940.94 C3.2 C2.2@2935.04,1940.94 ; C6.2@2948.82,1816.93 C2.2@2948.82,1944.88 ; C6.2@2952.76,1822.83 2952.76,1795.08 2984.25,1763.58 Q1.2 ; Q1.2@2988.19,1688.98 2988.19,1689.19 3004.31,1705.31 D1.1
  Bottom Layer w15: v1(2826.77,1893.7) 2803.15,1917.32 2803.15,2296.49 2811.94,2305.28 v1(2834.65,2305.28)
/A_DIR: U1.21 U12.23 | length 714.5
  Top Layer w15: U1.21 2757.29,2213.97 2796.72,2213.97 ; 2796.73,2213.98 2832.9,2213.98 v1(2834.65,2215.72) ; v1(3192.91,2216.54) 3399.94,2216.54 3417.32,2199.16 U12.23 U12.23@3417.32,2153.54
  Bottom Layer w15: v1(2834.65,2215.72) 2835.05,2216.13 3192.51,2216.13 v1(3192.91,2216.54)
/B_DIR: U1.17 U12.25 | length 577.5
  Top Layer w15: U1.17 2837.42,2111.22 v1(2838.58,2110.06) ; v1(3283.46,2106.3) 3284.73,2106.3 3288.67,2102.36 U12.25@3330.71,2102.36
  Bottom Layer w15: v1(2838.58,2110.06) 3278.44,2110.06 3282.2,2106.3 v1(3283.46,2106.3)
A_DIR: U1.22 U12.24 | length 658
  Top Layer w15: U1.22@2767.72,2238.97 2768.31,2239.56 2805.18,2239.56 2810.13,2244.51 2833.75,2244.51 v1(2834.65,2245.4) ; v1(3125.98,2244.09) 3214.57,2155.51 U12.24
  Bottom Layer w15: v1(2834.65,2245.4) 2835.3,2244.75 3125.33,2244.75 v1(3125.98,2244.09)
A_PWM: U1.23 U12.9 | length 1409.5
  Top Layer w15: U1.23@2791.34,2266.47 2796.74,2266.47 2804.96,2274.69 2833.75,2274.69 v1(2834.65,2275.59) ; v1(3055.12,2272.09) 3216.54,2110.67 v1(3216.54,2017.78) ; U12.9 3659.91,1882.35 3701.95,1882.35 v1(3702.4,1882.8)
  Bottom Layer w15: v1(2834.65,2275.59) 3050.35,2275.59 3053.85,2272.09 v1(3055.12,2272.09) ; v1(3216.54,2017.78) 3216.54,1854.33 3354.33,1716.54 3440.95,1716.54 3608.11,1883.7 3701.51,1883.7 v1(3702.4,1882.8)
B_DIR: U1.16 U12.26 | length 576
  Top Layer w15: U1.16 2817.86,2085.63 2828.68,2074.8 v1(2838.58,2074.8) ; v1(3283.46,2074.8) 3311.19,2074.8 3315.13,2070.87 U12.26@3326.77,2070.87
  Bottom Layer w15: v1(2838.58,2074.8) v1(3283.46,2074.8)
B_PWM: U1.15 U12.10 | length 1291
  Top Layer w15: U1.15 2757.29,2059.65 2795.42,2059.65 2809.06,2046.01 2837.69,2046.01 v1(2838.58,2045.12) ; U12.10 v1(3708.66,1913.39)
  Bottom Layer w15: v1(2838.58,2045.12) 3230.47,2045.12 3248.03,2027.56 3248.03,1870.08 3370.08,1748.03 3429.13,1748.03 3594.49,1913.39 v1(3708.66,1913.39)
BAT: Q1.3 S1.1 | length 916.8
  Top Layer w30: v1(2818.9,1677.17) 2830.71,1665.35 v1(2846.46,1665.35) Q1.3@2892.2,1665.35
  Bottom Layer w30: S1.1 2808.66,2399.21 2751.97,2342.52 2751.97,1744.09 v1(2818.9,1677.17)
D1: J2.9 U12.30 | length 633.3
  Top Layer w15: v1(3188.98,2350.39) 3188.98,2433.07 J2.9@3192.91,2437.01 ; v1(3279.53,1944.88) U12.30
  Bottom Layer w15: v1(3188.98,2350.39) 3188.98,2323.95 3338.58,2174.34 3338.58,2003.94 v1(3279.53,1944.88)
D2: J2.8 U12.31 | length 689.2
  Top Layer w15: v1(3228.35,2352.36) J2.8 ; v1(3279.53,1913.39) U12.31
  Bottom Layer w15: v1(3228.35,2352.36) 3229.24,2351.47 3229.24,2341.62 3370.08,2200.79 3370.08,2098.43 ; v1(3279.53,1913.39) 3295.28,1913.39 3370.08,1988.19 3370.08,2097.57
D3: J2.7 U12.32 | length 724.5
  Top Layer w15: v1(3267.72,2352.36) J2.7@3267.72,2431.1 ; v1(3279.53,1881.89) U12.32
  Bottom Layer w15: v1(3267.72,2352.36) 3267.72,2344.49 3401.57,2210.63 3401.57,1976.38 3307.09,1881.89 v1(3279.53,1881.89)
D4: J2.6 U12.1 | length 829.5
  Top Layer w15: v1(3307.09,2352.36) J2.6 ; v1(3385.83,1779.53) U12.1
  Bottom Layer w15: v1(3307.09,2352.36) 3484.25,2175.2 3484.25,1899.61 3386.72,1802.08 3386.72,1781.69 3386.53,1781.5 v1@3385.83,1781.5 ; v1(3385.83,1779.53) 3386.72,1780.42 v1@3386.72,1781.5
D5: J2.5 U12.2 | length 820.6
  Top Layer w15: v1(3346.46,2352.36) J2.5 ; v1(3417.32,1780.57) U12.2
  Bottom Layer w15: v1(3346.46,2352.36) 3512.4,2186.42 3512.4,1875.64 v1(3417.32,1780.57)
D6: J2.4 U12.11 | length 758
  Top Layer w15: v1(3385.83,2352.36) J2.4 J2.4@3385.83,2450.79 ; U12.11 v1(3708.66,1944.88)
  Bottom Layer w15: v1(3385.83,2352.36) 3537.4,2200.79 3537.4,1998.03 3590.55,1944.88 v1(3708.66,1944.88)
D7: J2.3 U12.12 | length 680.8
  Top Layer w15: v1(3425.2,2352.36) J2.3@3425.2,2431.1 ; U12.12 v1(3708.66,1976.38)
  Bottom Layer w15: v1(3425.2,2352.36) 3562.99,2214.57 3562.99,2020.6 3607.21,1976.38 v1(3708.66,1976.38)
D8: J2.2 U12.13 | length 631.3
  Top Layer w15: v1(3464.57,2352.36) J2.2@3464.57,2440.94 ; U12.13 v1(3708.66,2007.87)
  Bottom Layer w15: v1(3464.57,2352.36) 3602.36,2214.57 3602.36,2032.41 3626.9,2007.87 v1(3708.66,2007.87)
GND: C1.1 C2.1 C3.1 C4.1 C5.1 C6.1 C7.1 C8.1 C9.1 C10.1 C11.1 C12.2 C13.2 DS1.2 DS2.2 J1.06 J2.1 J3.12 J4.1 R10.1 R18.1 U1.3 U1.4 U1.9 U1.10 U1.18 U2.12 U3.4 U4.12 U5.2 U5.4 U7.4 U9.2 U9.4 U11.4 U12.3 U12.5 U12.21 U14.2 U14.4 U16.4 U18.2 U18.4 U19.1 VR1.1 | length 863.3
  Top Layer w15: v1(2272,3574.45) v1(2334.65,3511.81) ; U4.12@2657.48,3606.3 2660.61,3609.43 2660.61,3633.4 2670.45,3643.24 v1(2670.45,3644.51) ; U19.1 2822.83,1728.35 v1(2854.33,1759.84) ; C6.1 C6.1@3059.06,1816.93 ; C6.1@3062.99,1803.15 3062.99,1795.08 3077.54,1780.53 3085.61,1780.53 ; v1@3195.95,1693.81 v1(3196.85,1692.91) v1@3197.75,1692.02 ; R10.1@3204.72,1633.86 3204.72,1623.03 3215.93,1611.83 3226.75,1611.83 ; C10.1@3377.95,1720.47 3377.95,1696.85 C10.1 C10.1@3396.04,1711 ; C5.1@3445.49,3665.96 C5.1@3452.76,3673.23 ; C9.1 3503.94,1759.62 3511.81,1767.5 3511.81,1823.82 U12.5@3510.83,1824.8 ; C8.1 3667.32,2242.13 3718.5,2242.13 R18.1@3720.47,2244.09 ; v1(3927.95,3345.28) U2.12 ; v1(4948.82,3287.4) 4972.44,3263.78 v1(5090.55,3263.78)
  Bottom Layer w15: v1(5090.55,3263.78) 5090.55,3236.81 5122.05,3205.31 U3.4
  other v1: 3196.85,1807.09 4145.67,1956.69 2295.28,2122.05 2366.14,2239.75 3513.78,3193.13 3582.68,3346.46 3437.01,3614.17
IR_D1: J3.4 R1.1 U2.2 | length 1402.9
  Top Layer w15: J3.4@3188.98,3120.08 3188.98,3336.61 v1(3316.93,3464.57) ; v1@3395.67,3463.67 3399.52,3463.67 3443.9,3419.29 R1.1 ; v1(3395.67,3464.57) 3548.62,3617.52 3548.62,3720.75 3568.03,3740.16 3818.9,3740.16 3853.74,3705.32 3932.48,3705.32 3977.95,3659.84 U2.2
  Bottom Layer w15: v1(3316.93,3464.57) v1(3395.67,3464.57)
IR_D2: J3.5 R4.1 U2.1 | length 1546.6
  Top Layer w15: J3.5@3228.35,3120.08 3225.85,3122.58 3225.85,3334.11 3274.43,3382.7 3274.43,3382.78 3290.45,3398.8 3290.53,3398.8 3523.62,3631.89 3523.62,3740.16 3553.15,3769.68 3828.74,3769.68 3868.11,3730.32 3946.85,3730.32 4027.95,3649.21 U2.1 ; U2.1@4027.95,3598.43 4066.93,3598.43 4106.3,3559.06 R4.1
IR_D3: J3.6 R6.1 U2.14 | length 1178.9
  Top Layer w15: J3.6@3267.72,3110.24 3267.72,3335.35 3277.56,3345.19 v1(3277.56,3346.46) ; v1(4025.59,3346.46) 4027.95,3348.82 U2.14 4028.35,3389.76 R6.1@4106.3,3389.76
  Bottom Layer w15: v1(3277.56,3346.46) 3278.46,3345.56 3289,3345.56 3290.45,3344.11 3315.06,3344.11 3317.4,3346.46 3346.46,3346.46 3405.51,3287.4 3996.06,3287.4 4024.69,3316.03 4024.69,3345.56 v1(4025.59,3346.46)
IR_D4: J3.7 R9.1 U2.13 | length 1159.6
  Top Layer w15: v1(3301.77,3371.46) 3302.67,3370.56 3302.67,3360.02 3304.9,3357.78 3304.9,3314.67 3299.15,3308.92 3299.15,3229.17 3307.09,3221.23 J3.7@3307.09,3120.08 ; v1@3976.38,3314.96 3978.35,3316.93 4064.96,3316.93 4070.87,3322.83 R9.1 ; v1@3977.95,3318.5 U2.13
  Bottom Layer w15: v1(3301.77,3371.46) 3360.83,3371.46 3415.35,3316.93 v1(3976.38,3316.93)
IR_D5: J3.8 R13.1 U4.2 | length 1149.3
  Top Layer w15: R13.1@2456.69,3296.26 2463.96,3289 2472.72,3289 ; 2472.74,3288.98 v1(2606.69,3288.98) U4.2 ; v1(3326.49,3287.12) 3326.49,3285.85 3336.61,3275.73 3336.61,3212.68 3346.46,3202.83 J3.8@3346.46,3120.08
  Bottom Layer w15: v1(2606.69,3288.98) 3323.36,3288.98 3325.22,3287.12 v1(3326.49,3287.12)
IR_D6: J3.9 R17.1 U4.1 | length 1171.4
  Top Layer w15: R17.1@2456.69,3381.89 2456.69,3382.11 2463.96,3389.37 U4.1 2556.69,3319.29 v1(2559.06,3316.93) ; v1(3336.61,3316.93) 3336.61,3315.66 3366.14,3286.13 3366.14,3218.5 3385.83,3198.82 J3.9@3385.83,3120.08
  Bottom Layer w15: v1(2559.06,3316.93) v1(3336.61,3316.93)
IR_D7: J3.10 R21.1 U4.14 | length 1595.2
  Top Layer w15: R21.1 2454.72,3457.68 2475.77,3478.72 2477.82,3478.72 2500,3500.9 2500,3578.74 2519.68,3598.43 U4.14@2551.18,3598.43 ; U4.14 2556.69,3610.63 2588.33,3642.26 2597.22,3642.26 v1(2597.54,3641.95) ; v1(3366.14,3401.57) 3366.14,3321.49 3395.67,3291.96 3395.67,3238.19 3425.2,3208.66 J3.10 J3.10@3425.2,3100.39
  Bottom Layer w15: v1(2597.54,3641.95) 2598.43,3641.06 2598.43,3428.87 2624.34,3402.95 2876.1,3402.95 2878.44,3405.3 2901.09,3405.3 2904.81,3401.57 v1(3366.14,3401.57)
IR_D8: J3.11 R24.1 U4.13 | length 1628.6
  Top Layer w15: R24.1@2454.72,3525.59 2454.72,3576.77 2547.24,3669.29 2608.86,3669.29 2624.88,3653.27 2624.88,3650.82 2629.92,3645.78 v1(2629.92,3644.51) ; U4.13 2606.69,3610.63 2629.03,3632.96 v1@2629.03,3644.77 ; v1(3393.48,3421.48) 3393.48,3329.5 3427.76,3295.23 3427.76,3255.31 3464.57,3218.5 J3.11@3464.57,3120.08
  Bottom Layer w15: v1(2629.92,3644.51) 2630.82,3643.61 2630.82,3616.74 2641.73,3605.83 2641.73,3445.79 2650.52,3437.01 3372.89,3437.01 3387.52,3422.37 3392.59,3422.37 v1(3393.48,3421.48)
LED: J3.1 R3.1 R8.1 R16.1 R23.1 | length 3265.2
  Top Layer w15: R23.1 2082.68,3267.72 2133.86,3216.54 2866.14,3216.54 2981.91,3332.3 2981.91,3374.63 2993.11,3385.83 R16.1@2996.06,3385.83 ; R16.1 3000,3342.52 3027.56,3314.96 3027.56,3297.24 3061.02,3263.78 v1(3061.02,3228.35) 3061.02,3227.08 3070.87,3217.24 J3.1 ; v1(4748.03,3295.28) R8.1 4812.99,3332.68 R3.1@4814.96,3334.65
  Bottom Layer w15: v1(3061.02,3228.35) 3062.29,3228.35 3070.17,3220.47 4673.23,3220.47 v1(4748.03,3295.28)
LED_ON: Q2.1 R12.1 U12.14 | length 769.5
  Top Layer w15: U12.14 v1(3708.66,2039.37) ; R12.1@4110.24,2240.16 4117.13,2240.16 4146.35,2210.94 4151.27,2210.94 4173.23,2188.98 4173.23,2116.14 4129.92,2072.83 Q2.1 ; v1(4133.86,2019.68) Q2.1@4133.86,2070.87
  Bottom Layer w15: v1(3708.66,2039.37) 3709.56,2038.47 3716.73,2038.47 3747.11,2008.09 3808.98,2008.09 3820.58,2019.68 v1(4133.86,2019.68)
MISO: J1.01 R27.2 U12.16 | length 383
  Top Layer w15: U12.16 v1(3708.66,2102.36) ; v1(3784.63,2258.67) 3784.63,2259.94 3789.51,2264.81 3789.51,2265.89 3805.91,2282.29 3819.51,2282.29 3826.77,2289.55 R27.2@3826.77,2295.28 ; J1.01@3826.77,2173.23 J1.01
  Bottom Layer w15: v1(3708.66,2102.36) 3763.78,2102.36 3815.18,2153.76 3817.54,2153.76 J1.01@3834.65,2170.87 ; v1(3784.63,2258.67) 3817.54,2225.77 3817.54,2192.7 J1.01
MOSI: J1.04 R26.2 U12.15 | length 564.7
  Top Layer w15: U12.15 3775.59,2070.87 3822.83,2023.62 3862.2,2023.62 3904.43,2065.85 3929.63,2065.85 3984.25,2120.47 3984.25,2228.35 3966.54,2246.06 R26.2@3966.54,2293.31
NetC5_2: C5.2 U2.4 U2.6 U2.8 U2.10 U4.4 U4.6 U4.8 U4.10 VR1.2 | length 3012.7
  Top Layer w15: U4.4 2706.69,3332.68 2728.35,3311.02 2783.46,3311.02 2811.02,3338.58 2811.02,3358.27 ; U4.10 2756.69,3646.46 2795.28,3685.04 2818.9,3685.04 2856.69,3647.24 U4.8@2856.69,3610.63 ; U4.6@2809.06,3379.92 2810.61,3378.37 2810.61,3358.68 2811.02,3358.27 ; U4.6@2811.02,3381.89 U4.6@2811.02,3389.76 ; VR1.2@3267.72,3523.62 3267.72,3661.42 3334.65,3728.35 3459.65,3728.35 3445.49,3742.5 3442.54,3742.5 3409.45,3775.59 3066.93,3775.59 2905.89,3614.55 2860.61,3614.55 U4.8@2856.69,3610.63 ; C5.2 3469.49,3728.35 3503.94,3762.8 v1(3503.94,3771.65) ; v1(3685.04,3562.99) 3685.04,3404.72 3700.39,3389.37 U2.8 3728.35,3388.98 v1(3728.35,3346.46) ; U2.6 3777.95,3644.09 v1(3779.53,3645.67) ; v1(3826.77,3346.67) 3827.36,3347.26 U2.10@3827.36,3389.17 ; U2.4@3877.95,3602.36 v1(3877.95,3645.67) ; 2811.02,3358.27 2826.77,3342.52 2900.66,3342.52 2921.26,3363.12 2921.26,3522.44 2860.61,3583.09 2860.61,3594.49 2857.09,3598.01 2857.09,3598.43 U4.8 U4.8@2856.69,3610.63
  Bottom Layer w15: v1(3503.94,3771.65) 3653.54,3771.65 v1(3779.53,3645.67) ; v1(3685.04,3562.99) 3685.04,3606.3 3724.41,3645.67 v1(3779.53,3645.67) ; v1(3728.35,3346.46) v1@3818.9,3346.46 ; v1(3877.95,3645.67) v1(3779.53,3645.67)
NetC11_2: C11.2 U12.20 | length 109.2
  Top Layer w15: U12.20 3513.08,2156.78 3513.08,2249.3 C11.2@3523.62,2259.84
NetC12_1: C12.1 U12.7 X1.2 | length 350
  Top Layer w15: U12.7 3574.8,1795.28 3641.95,1728.13 3818.68,1728.13 X1.2
NetC13_1: C13.1 U12.8 X1.1 | length 645.4
  Top Layer w15: U12.8 3687.01,1828.74 3740.16,1881.89 3992.13,1881.89 4020.3,1910.06 4021.28,1910.06 4035.43,1924.21 C13.1@4035.43,1925.2 ; C13.1 4038.98,1925.59 4038.98,1764.17 4043.31,1759.84 X1.1@4043.31,1760.63
  Bottom Layer w15: X1.1 X1.1@4044.88,1759.84
NetD1_2: D1.2 Q1.1 R10.2 | length 162.6
  Top Layer w15: Q1.1@2984.25,1625.98 2989.47,1620.77 D1.2@3062.99,1620.77 ; D1.2@3062.99,1618.11 3071.46,1618.11 3083.27,1629.92 R10.2
NetDS1_1: DS1.1 R26.1 | length 88.7
  Top Layer w15: R26.1@4033.46,2290.35 4033.46,2299.21 4042.7,2308.44 4042.7,2345.85 4055.12,2358.27 DS1.1@4055.12,2370.08
NetDS2_1: DS2.1 R27.1 | length 67.4
  Top Layer w15: R27.1@3895.67,2299.21 3895.67,2356.3 DS2.1@3901.57,2362.2 ; DS2.1@3901.57,2364.17 DS2.1@3901.57,2366.14
NetJ4_2: J4.2 S1.2 | length 859.2
  Bottom Layer w30: J4.2@1921.26,2440.94 1933.07,2440.94 2031.5,2539.37 2633.86,2539.37 S1.2
NetM1_1: M1.1 U1.1 U1.2 | length 783.9
  Top Layer w15: 2479.32,2274.6 U1.1
  Top Layer w30: M1.1@1763.26,2390.29 1770.33,2390.29 1795.48,2365.14 1795.48,2358.07 1878.95,2274.6 2479.33,2274.6
NetM1_2: M1.2 U1.5 U1.6 | length 954.4
  Top Layer w15: 2438,2173.23 2448.83,2162.4 U1.6 U1.5
  Top Layer w30: M1.2@1649.61,2383.11 1657.51,2383.11 1664.75,2375.87 1664.75,2362.81 1854.33,2173.23 2438,2173.23
NetM2_1: M2.1 U1.11 U1.12 | length 3290.6
  Top Layer w15: 2439.58,2019.68 2448.98,2029.09 2448.98,2033.52 2449.91,2034.45 U1.11 ; U1.11@2479.39,2034.45 2480.32,2033.52 U1.12@2480.32,2011.81
  Top Layer w30: v1(2377.95,2035.43) 2382.87,2035.43 v1(2405.51,2012.8) 2412.4,2019.68 2439.58,2019.68
  Bottom Layer w30: v1@2405.02,2012.3 2803.15,1614.17 4195.02,1614.17 4212.6,1631.75 4212.6,1818.9 4787.4,2393.7 4787.4,2395.67 4797.73,2426.86 4787.4,2490.96 M2.1
NetM2_2: M2.2 U1.7 U1.8 | length 3506.5
  Top Layer w15: 2439.58,2125.98 2448.36,2134.77 2448.36,2135.26 2449.91,2136.81 U1.7
  Top Layer w30: v1(2363.19,2128.94) 2388.78,2128.94 v1(2389.76,2129.92) ; v1@2389.76,2125.98 2439.58,2125.98
  Bottom Layer w30: v1(2363.19,2128.94) 2361.22,2128.94 2318.9,2086.61 2318.9,2031.5 2783.46,1566.93 4221.92,1566.93 4277.04,1622.05 4381.89,1622.05 4448.82,1688.98 4448.82,1909.45 4884.6,2345.23 4884.6,2354.35 4913.99,2383.74 M2.2@4921.86,2383.74
NetR2_1: R2.1 U2.5 U3.3 | length 2303.3
  Top Layer w15: U2.5 3827.95,3652.36 3795.28,3685.04 3630.83,3685.04 3622.05,3676.25 3622.05,3307.09 3708.66,3220.47 4909.45,3220.47 4996.06,3133.86 4996.06,3082.68 5021.28,3082.68 5031.5,3072.46 R2.1@5031.5,3070.87 ; v1(5039.37,3035.43) R2.1@5039.37,3070.87
  Bottom Layer w15: v1(5039.37,3035.43) 5042.32,3032.48 U3.3
NetR3_2: R3.2 U3.1 | length 499.1
  Top Layer w15: R3.2 4827.76,3399.61 4888.78,3338.58 5098.43,3338.58 v1(5181.1,3255.91)
  Bottom Layer w15: v1(5181.1,3255.91) 5181.1,3254.64 5192.91,3242.83 5192.91,3188.98 U3.1@5188.98,3185.04
NetR5_1: R5.1 U2.7 U5.3 | length 1639
  Top Layer w15: v1(3724.41,3259.84) 3712.6,3259.84 3653.54,3318.9 3653.54,3574.8 3677.56,3598.82 U2.7 ; v1(4448.82,3413.39) 4463.58,3413.39 4483.27,3393.7 R5.1 ; R5.1@4477.27,3398.71 R5.1@4484.25,3391.73
  Bottom Layer w15: v1(3724.41,3259.84) 4062.99,3259.84 4173.23,3370.08 4224.41,3370.08 4287.4,3433.07 4381.89,3433.07 4444.88,3370.08 4500,3370.08 4543.57,3326.51 U5.3@4564.78,3326.51 ; v1(4448.82,3413.39) 4500,3413.39 4564.78,3348.6 U5.3@4564.78,3326.51 ; U5.3 4570.87,3318.9 4564.78,3324.98 U5.3@4564.78,3326.51
NetR7_1: R7.1 U2.9 U7.3 | length 1025.1
  Top Layer w15: U2.9 3777.95,3281.1 3803.15,3255.91 4007.87,3255.91 4040.66,3288.69 4042.41,3288.69 v1(4043.31,3289.59) ; v1(4216.54,3401.79) 4216.54,3403.06 4236.22,3422.74 4236.22,3486.92 4237.49,3488.19 v1@4238.38,3488.19 ; v1@4239.26,3488.19 R7.1@4239.26,3540.27
  Bottom Layer w15: U7.3 4019.68,3482.87 4025.77,3488.96 4032.26,3488.96 4061.61,3518.31 4077.28,3518.31 4078.66,3519.68 4204.72,3519.68 v1@4234.25,3490.16 ; v1(4043.31,3289.59) 4155.51,3401.79 v1(4216.54,3401.79)
  other v1: 4236.22,3488.19
NetR8_2: R8.2 U7.1 | length 777.6
  Top Layer w15: v1(4152.74,3643.65) 4153.29,3643.1 4191.41,3643.1 4192.78,3641.73 4216.54,3641.73 4381.89,3476.38 4671.26,3476.38 R8.2
  Bottom Layer w15: U7.1 4090.55,3637.02 4096.63,3643.1 4096.63,3643.65 v1(4152.74,3643.65)
NetR11_1: R11.1 U2.11 U9.3 | length 604.5
  Top Layer w15: v1(3515.75,3460.63) 3523.62,3452.76 R11.1 ; v1(3877.95,3346.46) U2.11
  Bottom Layer w15: 3507.87,3469.77 3515.75,3461.9 v1(3515.75,3460.63) ; U9.3 3507.87,3472.44 v1@3517.08,3463.23 ; v1@3516.64,3461 3517.91,3459.73 3520.58,3459.73 3606.3,3374.02 3869.17,3374.02 3877.95,3365.23 v1(3877.95,3346.46)
NetR14_1: R14.1 U4.5 U11.3 | length 703.6
  Top Layer w15: v1(2755.91,3344.27) 2756.69,3345.06 U4.5 ; v1(2952.76,3344.27) v1(2952.76,3488.19) ; R14.1 v1(3161.42,3500)
  Bottom Layer w15: v1(2755.91,3344.27) v1(2952.76,3344.27) ; v1(2952.76,3488.19) 2953.65,3489.09 2958.18,3489.09 U11.3@2996.06,3526.97 ; U11.3 U11.3@2996.06,3526.97 ; v1(3161.42,3500) 3145.67,3484.25 3038.78,3484.25 U11.3@2996.06,3526.97
NetR15_1: R15.1 R18.2 U12.19 | length 950.6
  Top Layer w15: R15.1@2952.76,2287.4 2952.76,2291.95 2963.96,2303.15 3203.22,2303.15 ; 3204.72,2303.15 3547.85,2303.15 ; U12.19 3543.31,2205.62 3560.65,2222.96 3560.65,2290.35 3547.85,2303.15 ; R18.2@3732.28,2311.02 3724.41,2303.15 3547.85,2303.15
NetR16_2: R16.2 U11.1 | length 276.6
  Top Layer w15: R16.2 v1(3000,3629.92)
  Bottom Layer w15: v1(3000,3629.92) 3001.27,3629.92 3022.26,3650.91 3035.36,3650.91 3062.99,3678.54 U11.1@3062.99,3692.91
NetR19_1: R19.1 U4.7 U14.3 | length 753.5
  Top Layer w15: U4.7 2856.69,3381.87 2860.61,3377.95 v1(2889.76,3377.95) ; v1(3066.93,3346.46) R19.1@3066.93,3385.83
  Bottom Layer w15: U14.3@2488.19,3472.44 U14.3 2488.19,3402.49 2512.72,3377.95 v1(2889.76,3377.95) 2891.03,3377.95 2897.37,3371.61 3041.77,3371.61 v1(3066.93,3346.46)
NetR22_1: R22.1 U4.9 U16.3 | length 1234.8
  Top Layer w15: R22.1@2145.67,3448.82 R22.1 2192.91,3456.69 v1(2200.79,3464.57) ; U4.9 2807.09,3599.21 v1(2807.09,3645.67)
  Bottom Layer w15: U16.3 1933.07,3290.75 1961.7,3262.12 1983.66,3262.12 1983.99,3261.79 2034.52,3261.79 2043.31,3270.58 2043.31,3307.09 v1(2200.79,3464.57) 2413.39,3677.17 2523.62,3677.17 2543.31,3696.85 2755.91,3696.85 v1(2807.09,3645.67)
NetR23_2: R23.2 U16.1 | length 128
  Top Layer w15: v1@2078.74,3488.19 2082.68,3484.25 R23.2
  Bottom Layer w15: U16.1 2003.94,3466.36 2010.02,3472.44 2065.44,3472.44 2077.47,3484.47 v1(2078.74,3484.47)
NetR25_1: R25.1 U4.11 U18.3 | length 1844.9
  Top Layer w15: v1(1385.83,2980.32) 1488.19,2980.32 1541.34,3033.46 R25.1 ; R25.1@1541.34,3112.2 1541.34,3309.06 1641.73,3409.45 2523.62,3696.85 2696.85,3696.85 2706.69,3687.01 U4.11
  Bottom Layer w15: U18.3@1381.89,3027.56 1385.83,3023.62 v1(1385.83,2980.32)
NetU3_2: U3.2 U5.1 | length 951.6
  Bottom Layer w15: U5.1 4725.39,3463.58 4767.72,3421.26 4901.57,3421.26 4984.25,3338.58 4984.25,3023.62 5023.62,2984.25 5162.01,2984.25 5192.91,3015.16 U3.2@5192.91,3019.68
NetU7_2: U7.2 U9.1 | length 745.6
  Bottom Layer w15: U9.1 3578.74,3682.48 3633.86,3627.36 3633.86,3507.87 3708.66,3433.07 3890.61,3433.07 3914.23,3409.45 4051.77,3409.45 4090.55,3448.23 U7.2
NetU11_2: U11.2 U14.1 | length 637.8
  Top Layer w15: v1(2740.16,3669.29) 2783.46,3712.6 2838.58,3712.6 v1(2894.97,3656.21)
  Bottom Layer w15: U14.1 2559.06,3639.37 2570.2,3650.51 2570.2,3653.27 2588.77,3671.85 2737.6,3671.85 v1(2740.16,3669.29) ; v1(2894.97,3656.21) 2948.82,3602.36 3026.18,3602.36 3070.87,3557.68 U11.2@3070.87,3547.24
NetU16_2: U16.2 U18.1 | length 649.3
  Bottom Layer w15: U18.1@1460.63,3192.91 1590.55,3192.91 1763.78,3366.14 1963.19,3366.14 2003.94,3325.39 U16.2
RST: J1.05 R20.2 U12.29 | length 1308.9
  Top Layer w15: v1(3248.03,1775.59) 3248.03,1952.05 3272.36,1976.38 U12.29 ; J1.05 3842.03,1978.25 3871.95,1978.25 3911.4,2017.7 4020.3,2017.7 4027.56,2010.43 R20.2@4027.56,2003.94
  Bottom Layer w15: v1(3248.03,1775.59) 3354.33,1669.29 3639.17,1669.29 3834.65,1864.76 J1.05@3834.65,1972.44
SCK: J1.03 U12.17 | length 269.4
  Top Layer w15: U12.17 3608.27,2157.48 3752.76,2157.48 J1.03 3838.58,2071.65 J1.03@3838.58,2070.87
pads on no net: J2.10 J2.Z1 J2.Z2 J3.3 J3.Z1 J3.Z2 S1.3 U12.22 U12.27 U12.28

## Polygon pours and split planes (outlines as drawn)
GND on Bottom Layer "NONET_L-01_P-001" (solid, pour order 4): 1574.8,1811.02 1555.12,1791.34 1555.12,1653.54 1496.06,1594.49 1377.95,1594.49 1338.58,1633.86 1338.58,2500 1417.32,2578.74 2893.7,2578.74 2893.7,2716.54 3681.1,2716.54 3681.1,2578.74 5137.8,2578.74 5236.22,2500 5236.22,1633.86 5196.85,1594.49 5078.74,1594.49 5019.69,1653.54 5019.69,1791.34 5000,1811.02 4507.87,1811.02 4488.19,1791.34 4488.19,1673.23 4330.71,1515.75 2224.41,1515.75 2086.61,1653.54 2086.61,1791.34 2066.93,1811.02
GND on Bottom Layer "NONET_L-01_P-001" (solid, pour order 0): 1811.02,3188.98 1535.43,2952.76 1338.58,2952.76 1338.58,3346.46 2253.94,3631.89 2834.65,3818.9 3740.16,3818.9 5236.22,3346.46 5236.22,2952.76 5039.37,2952.76 4763.78,3188.98 3681.1,3188.98 3681.1,2854.33 2893.7,2854.33 2893.7,3188.98
GND on Top Layer "NONET_L-01_P-001" (solid, pour order 3): 1555.12,1653.54 1496.06,1594.49 1377.95,1594.49 1338.58,1633.86 1338.58,2500 1417.32,2578.74 2893.7,2578.74 2893.7,2716.54 3681.1,2716.54 3681.1,2578.74 5137.8,2578.74 5236.22,2500 5236.22,1633.86 5196.85,1594.49 5078.74,1594.49 5019.69,1653.54 5019.69,1791.34 5000,1811.02 4507.87,1811.02 4488.19,1791.34 4488.19,1673.23 4330.71,1515.75 2224.41,1515.75 2086.61,1653.54 2086.61,1791.34 2066.93,1811.02 1574.8,1811.02 1555.12,1791.34